# EAGLE board cfc-card (EAGLE 9.6.2), part 1 of 2
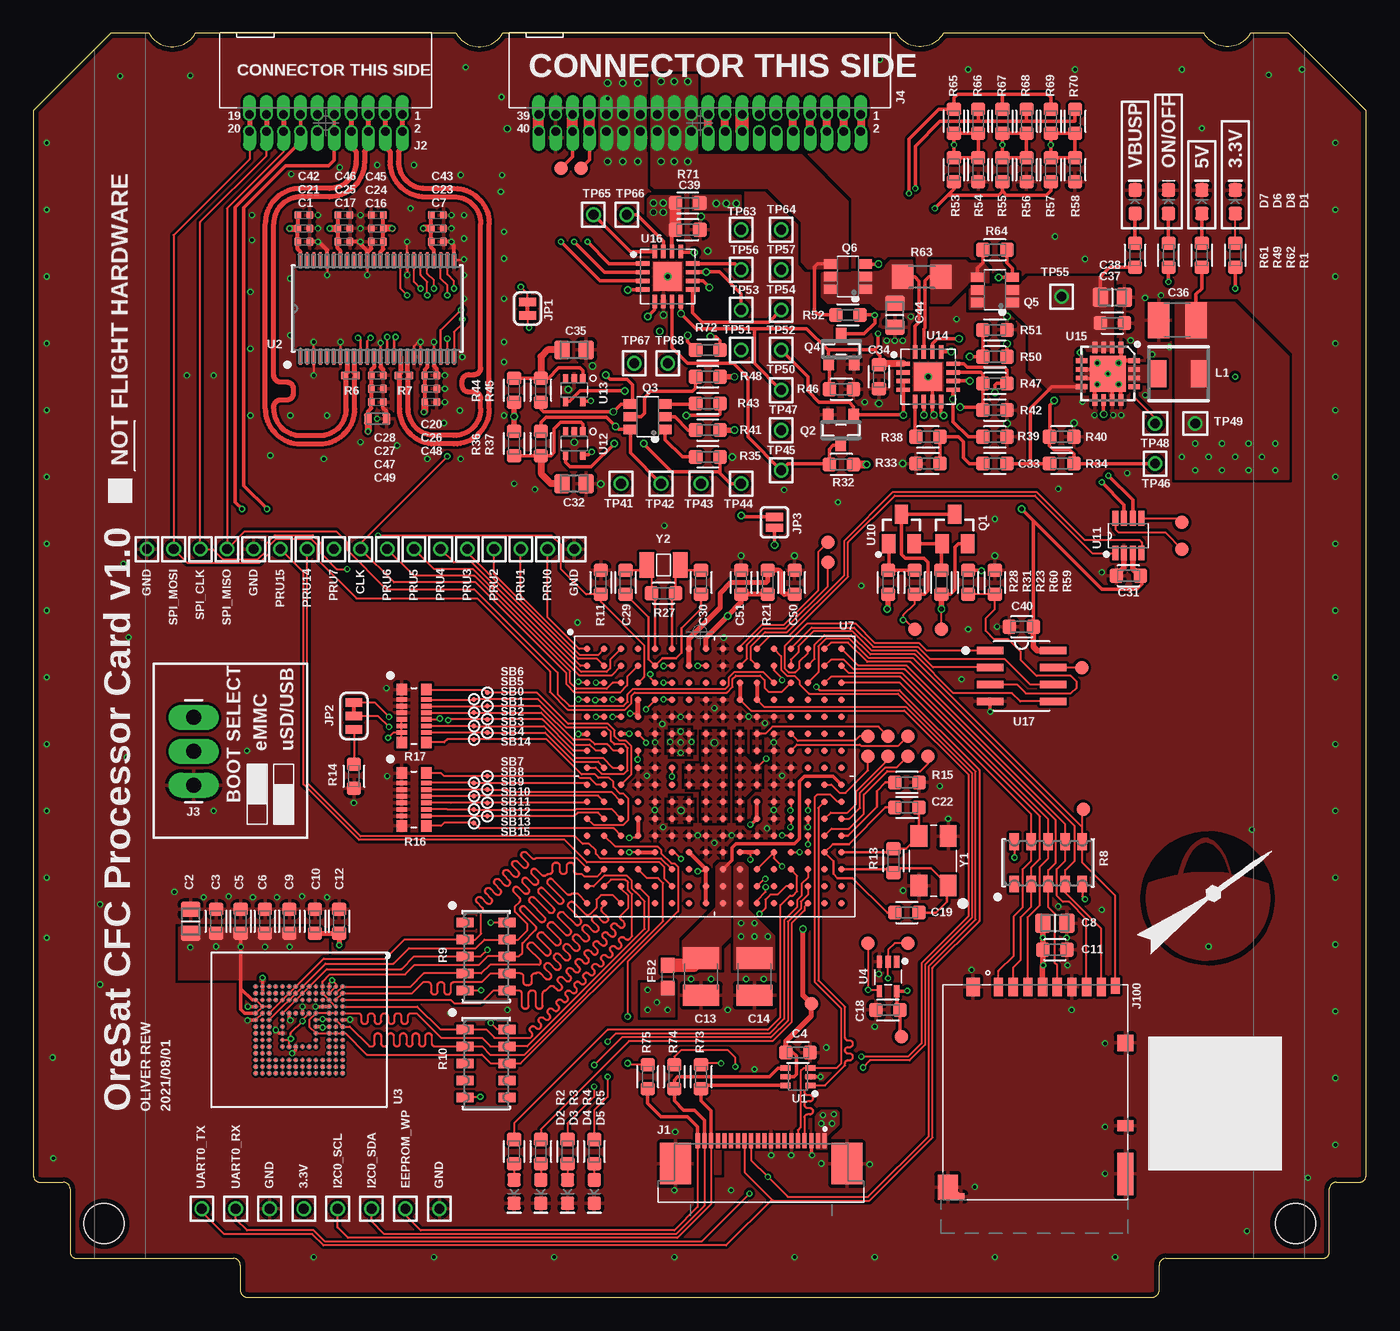
[diagram p0: board, top side]
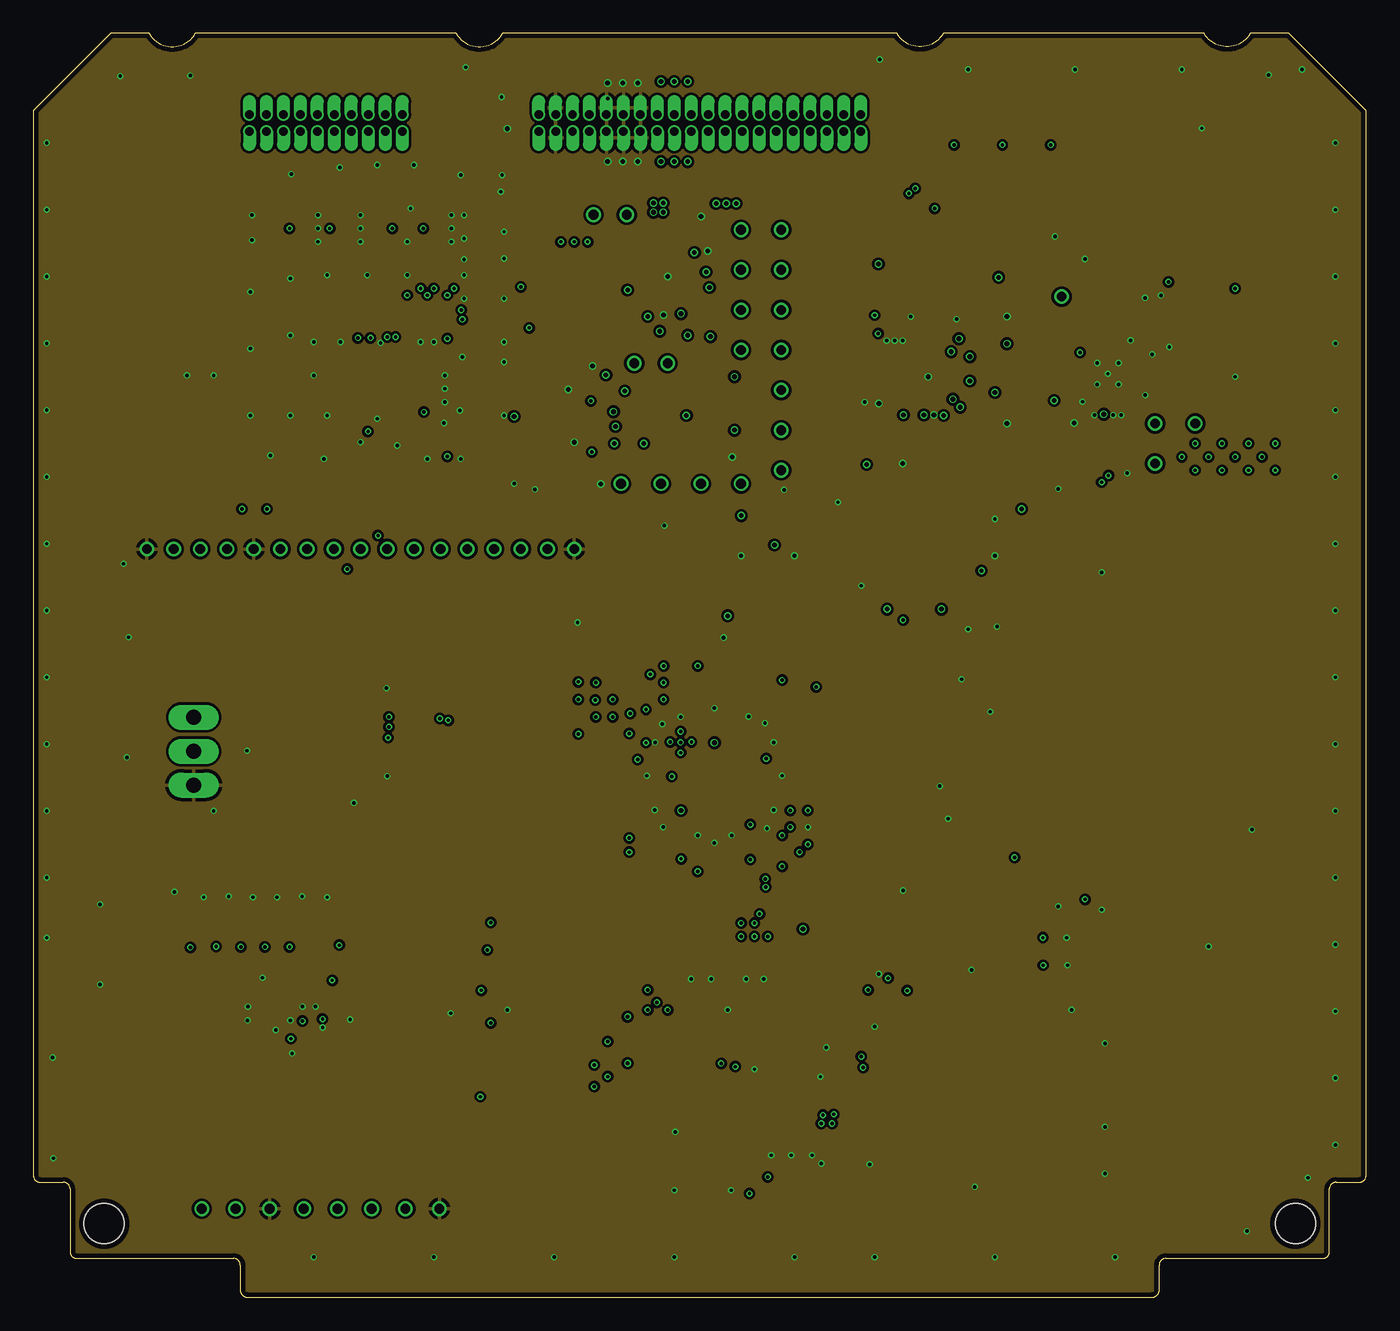
[diagram p1: board, inner layer Route2]
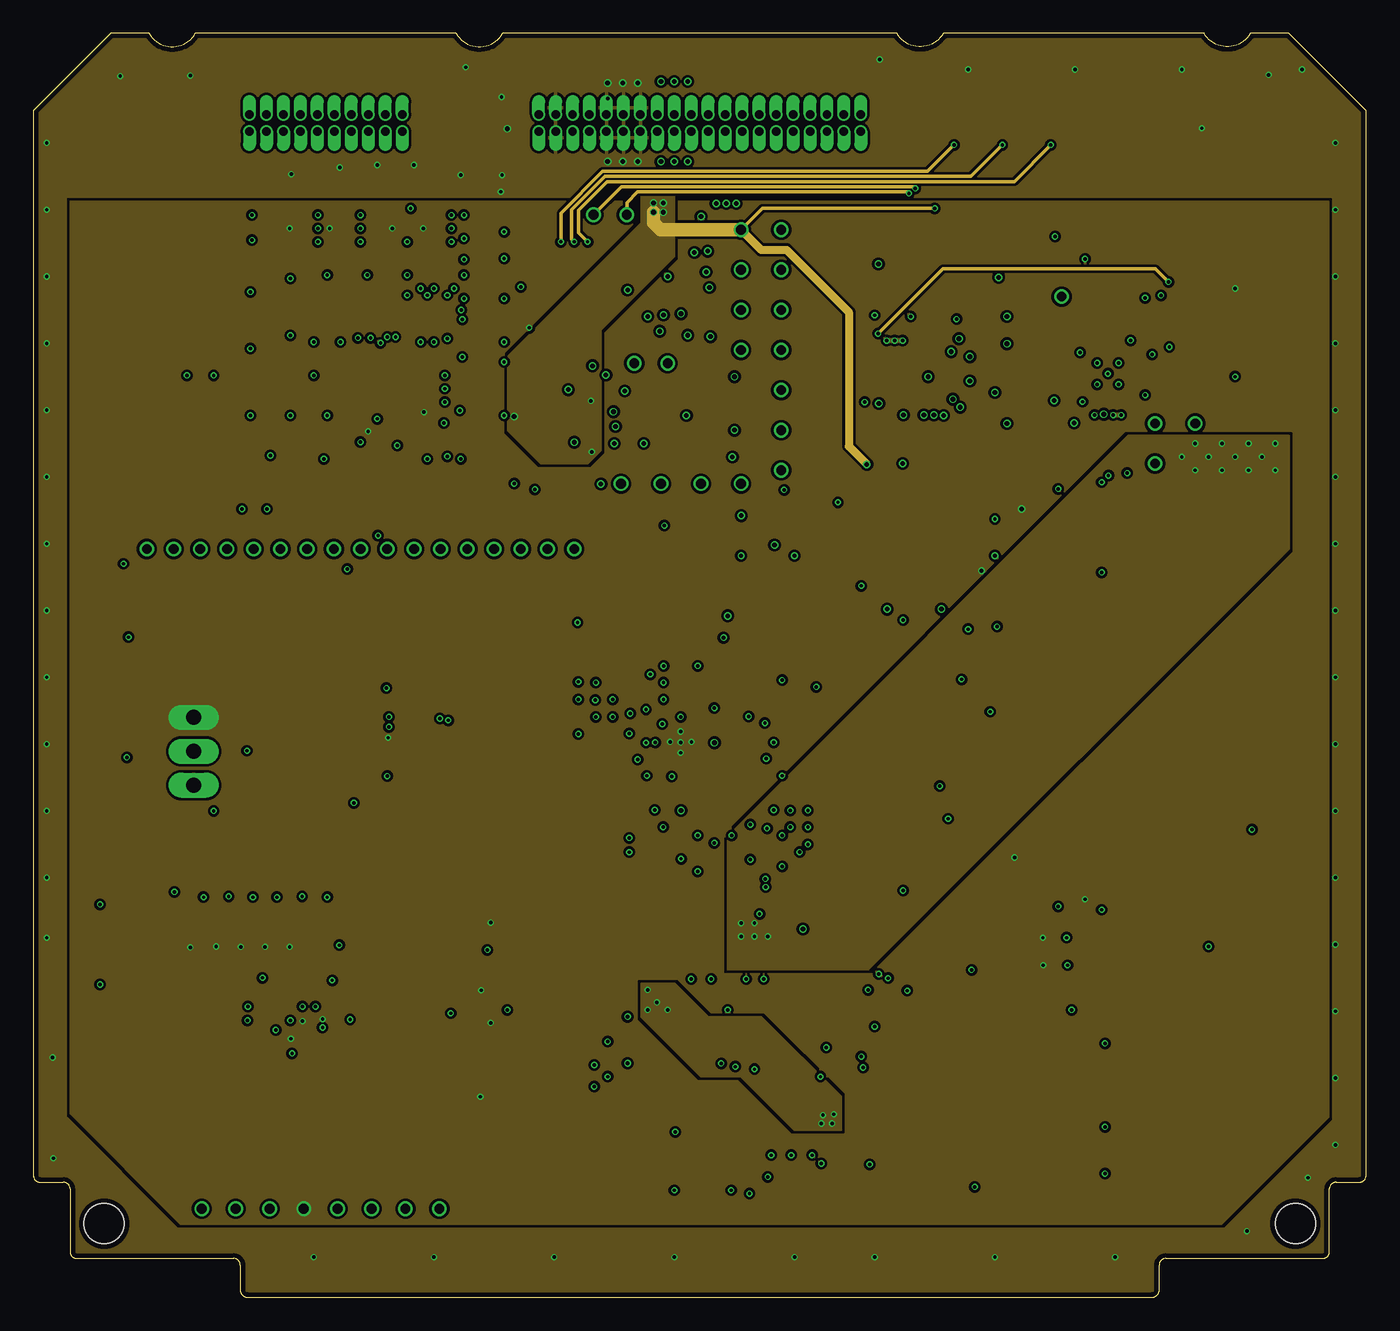
[diagram p2: board, inner layer Route15]
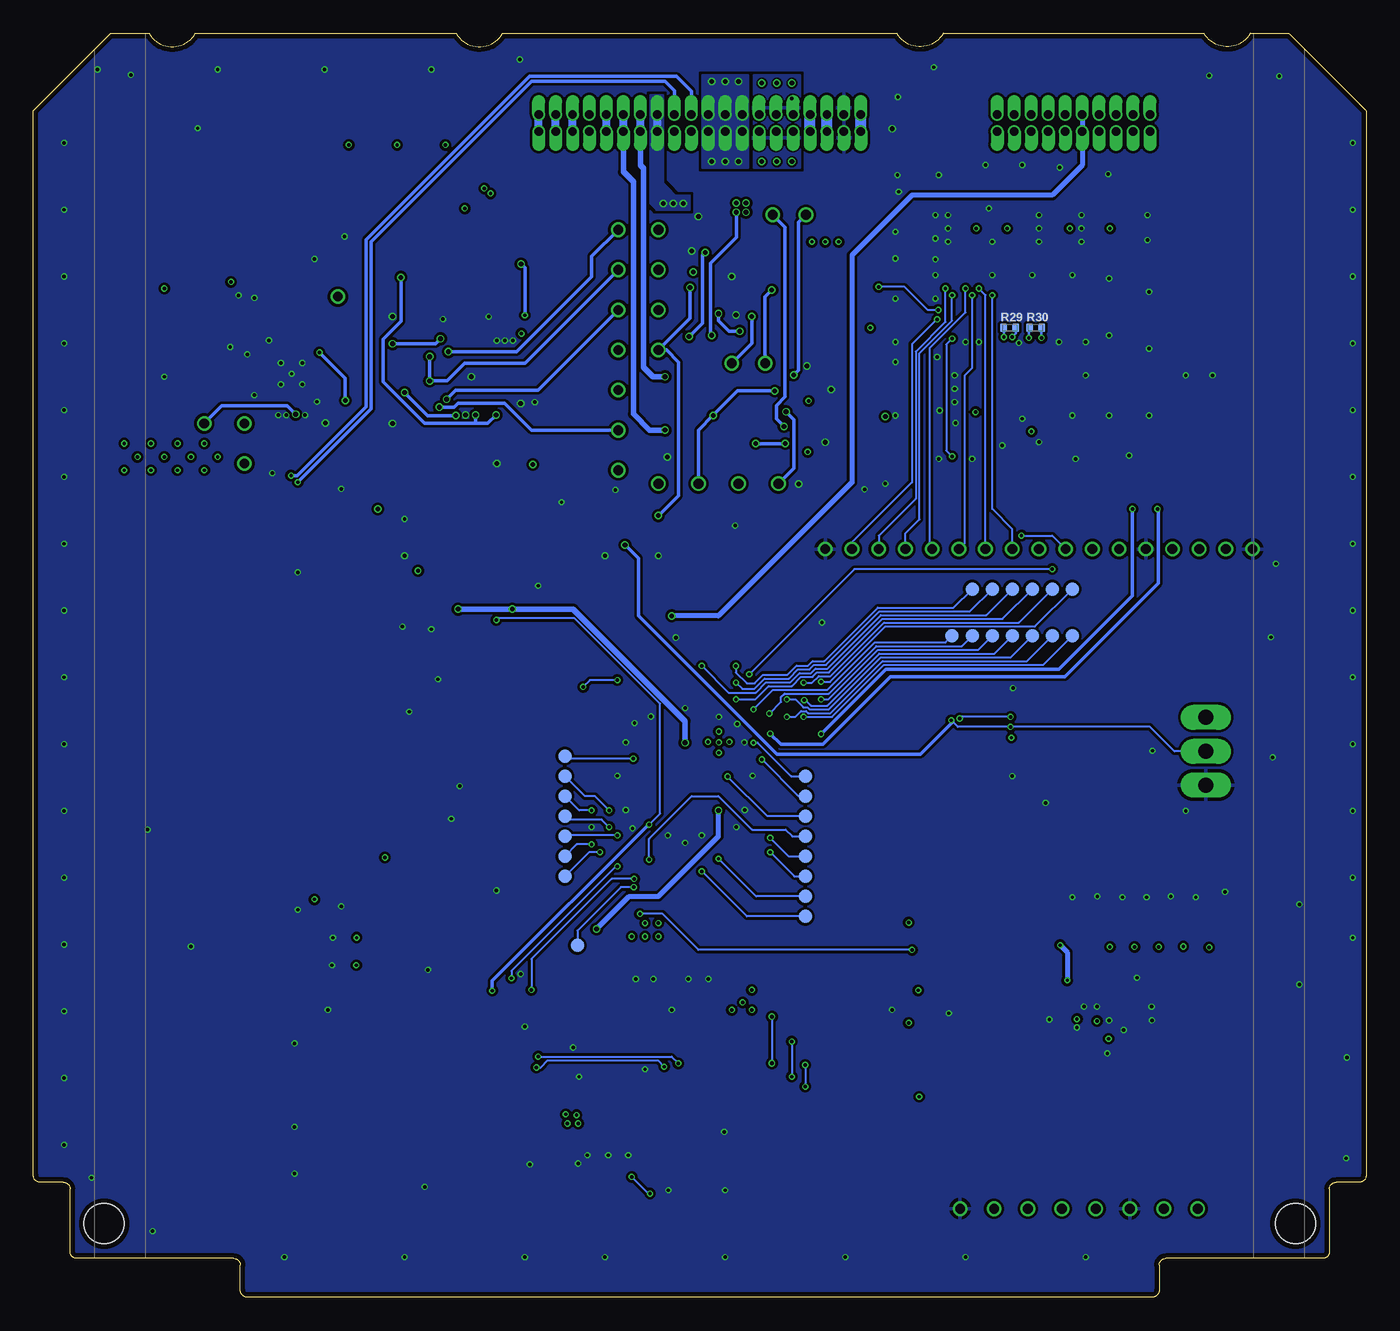
[diagram p3: board, bottom side, seen from below]

Size 99.8 x 94.6 mm. Coordinates in mm from the lower left corner, seen from the top.
Copper layers (1*2*15*16): Top 0.035559375mm / dielectric 0.17018125mm / Route2 0.01778125mm / dielectric 47mil / Route15 0.01778125mm / dielectric 0.17018125mm / Bottom 0.035559375mm
Design rules "4-layer_tented *": minimum track width 5mil, minimum drill 10mil, track to track 5mil, track to pad 5mil, pad to pad 5mil, via to via 5mil, smd to smd 5mil, copper to edge 15mil, drill to drill 6mil, minimum pad ring 4mil, minimum via ring 4mil, stop-mask expansion 2.5mil, vias tented up to drill 20mil, thermal gap 10mil
Net classes: 1 diff pair: width 0.381 mm, clearance 0.508 mm to class 0, clearance 0.254 mm

## Footprints (pad centres in the part's own frame; a part is rotated, then mirrored left to right if it is on the bottom)
.0402-C-NOSILK = smd 0.5 x 0.6: 1 -0.45,0; 2 0.45,0
.0805-B = smd 1.15 x 1.45: 1 -0.9,0; 2 0.9,0
.0603-A = smd 1 x 1.05: 1 -0.9,0; 2 0.9,0
C1210 = smd 1.6 x 2.7: 1 -1.4,0; 2 1.4,0
.0805-B-NOSILK = smd 1.15 x 1.45: 1 -0.9,0; 2 0.9,0
.0603-C-NOSILK = smd 0.6 x 0.9: 1 -0.7,0; 2 0.7,0
LED-0603 = smd 1 x 1: A -0.877,0; C 0.877,0
0603 = smd 1.1 x 1: 1 -0.85,0; 2 0.85,0
TE_2-1734592-0 = smd 0.3 x 1.1: 1 -4.75,-1.7; 2 -4.25,-1.7; 3 -3.75,-1.7; 4 -3.25,-1.7; 5 -2.75,-1.7; 6 -2.25,-1.7; 7 -1.75,-1.7; 8 -1.25,-1.7; 9 -0.75,-1.7; 10 -0.25,-1.7; 11 0.25,-1.7; 12 0.75,-1.7; 13 1.25,-1.7; 14 1.75,-1.7; 15 2.25,-1.7; 16 2.75,-1.7; 17 3.25,-1.7; 18 3.75,-1.7; 19 4.25,-1.7; 20 4.75,-1.7 | smd 2.3 x 3.1: PAD1 6.42,0; PAD2 -6.42,0
J-SAMTEC-TFM-110-X1-XXX-D-RA = drill 0.635 pad 0.965 offset: 1 5.715,0.635; 2 5.715,-0.635; 3 4.445,0.635; 4 4.445,-0.635; 5 3.175,0.635; 6 3.175,-0.635; 7 1.905,0.635; 8 1.905,-0.635; 9 0.635,0.635; 10 0.635,-0.635; 11 -0.635,0.635; 12 -0.635,-0.635; 13 -1.905,0.635; 14 -1.905,-0.635; 15 -3.175,0.635; 16 -3.175,-0.635; 17 -4.445,0.635; 18 -4.445,-0.635; 19 -5.715,0.635; 20 -5.715,-0.635
1X03_LONGPADS = drill 1.118 pad 1.88 long: 1 0,0; 2 2.54,0; 3 5.08,0
J-SAMTEC-TFM-120-X1-XXX-D-RA = drill 0.635 pad 0.965 offset: 1 12.065,0.635; 2 12.065,-0.635; 3 10.795,0.635; 4 10.795,-0.635; 5 9.525,0.635; 6 9.525,-0.635; 7 8.255,0.635; 8 8.255,-0.635; 9 6.985,0.635; 10 6.985,-0.635; 11 5.715,0.635; 12 5.715,-0.635; 13 4.445,0.635; 14 4.445,-0.635; 15 3.175,0.635; 16 3.175,-0.635; 17 1.905,0.635; 18 1.905,-0.635; 19 0.635,0.635; 20 0.635,-0.635; 21 -0.635,0.635; 22 -0.635,-0.635; 23 -1.905,0.635; 24 -1.905,-0.635; 25 -3.175,0.635; 26 -3.175,-0.635; 27 -4.445,0.635; 28 -4.445,-0.635; 29 -5.715,0.635; 30 -5.715,-0.635; 31 -6.985,0.635; 32 -6.985,-0.635; 33 -8.255,0.635; 34 -8.255,-0.635; 35 -9.525,0.635; 36 -9.525,-0.635; 37 -10.795,0.635; 38 -10.795,-0.635; 39 -12.065,0.635; 40 -12.065,-0.635
DM3BT-DSF-PEJS = smd 0.7 x 1.4: 1 -3.2,15.95; 2 -2.1,15.95; 3 -1,15.95; 4 0.1,15.95; 5 1.2,15.95; 6 2.3,15.95; 7 3.4,15.95; 8 4.5,15.95 | smd 0.7 x 1.2: CD 5.55,16.05 | smd 0.5 x 0.5: CGND1 -6,0.25 | smd 1.5 x 1.9: CGND2 -7,0.95 | smd 0.21 x 0.21 rotated 45: CGND3 -6.25,0.5 | smd 1 x 1.4: CGND4 -5.1,15.95 | smd 1.2 x 1.2: CGND5 6.3,11.75 | smd 1.2 x 3.2: CGND6 6.3,1.95 | smd 1.2 x 0.8: GND 6.3,5.55
SMT-JUMPER_2_NC_TRACE_SILK = smd 0.635 x 1.27: 1 -0.508,0; 2 0.508,0
SMT-JUMPER_3_1-NC_TRACE_SILK = smd 0.635 x 1.27: 1 -1.016,0; 2 0,0; 3 1.016,0
SMT-JUMPER_2_NO_SILK = smd 0.635 x 1.27: 1 -0.406,0; 2 0.406,0
ECS-MPI4040 = smd 2 x 1.3: 1 0,1.575; 2 0,-1.575
ORESAT-CARD-V1.3-GENERIC-0RF = hole 3: 94.5,5.5; 5.3,5.5
SOT23-BEC = smd 1 x 1.4: B -0.95,-1.1; C 0,1.1; E 0.95,-1.1
SOT23 = smd 0.787 x 0.889: 1 -0.953,-1.143; 2 0.953,-1.143; 3 0,1.143
SOT23-6 = smd 0.7 x 1: 1 -0.95,-1.3; 2 0,-1.3; 3 0.95,-1.3; 4 0.95,1.3; 5 0,1.3; 6 -0.95,1.3
ARRAY_EXBA-M = smd 1.27 x 0.711: 1 -1.575,2.54; 2 -1.575,1.27; 3 -1.575,0; 4 -1.575,-1.27; 5 -1.575,-2.54; 6 1.575,-2.54; 7 1.575,-1.27; 8 1.575,0; 9 1.575,1.27; 10 1.575,2.54
RES_EXB2HV = smd 0.787 x 0.864: 1 -0.914,1.981; 8 -0.914,-1.981; 9 0.914,-1.981; 16 0.914,1.981 | smd 0.787 x 0.356: 2 -0.914,1.234; 3 -0.914,0.74; 4 -0.914,0.247; 5 -0.914,-0.247; 6 -0.914,-0.74; 7 -0.914,-1.234; 10 0.914,-1.234; 11 0.914,-0.74; 12 0.914,-0.247; 13 0.914,0.247; 14 0.914,0.74; 15 0.914,1.234
R1206 = smd 1.6 x 1.803: 1 -1.422,0; 2 1.422,0
TEST-POINT-SMALL = smd 0.381 x 0.381: TP 0,0
2MM-TEST-POINT = drill 0.737: 1 0,0
PAD.03X.04 = smd 1.016 x 1.016: P$1 0,0
SC70-6 = smd 0.4 x 0.75: 1 -0.65,-0.925; 2 0,-0.925; 3 0.65,-0.925; 4 0.65,0.925; 5 0,0.925; 6 -0.65,0.925
MTD48_TEX-L = smd 1.168 x 0.178: 1 -3.619,5.75; 2 -3.619,5.25; 3 -3.619,4.75; 4 -3.619,4.25; 5 -3.619,3.75; 6 -3.619,3.25; 7 -3.619,2.75; 8 -3.619,2.25; 9 -3.619,1.75; 10 -3.619,1.25; 11 -3.619,0.75; 12 -3.619,0.25; 13 -3.619,-0.25; 14 -3.619,-0.75; 15 -3.619,-1.25; 16 -3.619,-1.75; 17 -3.619,-2.25; 18 -3.619,-2.75; 19 -3.619,-3.25; 20 -3.619,-3.75; 21 -3.619,-4.25; 22 -3.619,-4.75; 23 -3.619,-5.25; 24 -3.619,-5.75; 25 3.619,-5.75; 26 3.619,-5.25; 27 3.619,-4.75; 28 3.619,-4.25; 29 3.619,-3.75; 30 3.619,-3.25; 31 3.619,-2.75; 32 3.619,-2.25; 33 3.619,-1.75; 34 3.619,-1.25; 35 3.619,-0.75; 36 3.619,-0.25; 37 3.619,0.25; 38 3.619,0.75; 39 3.619,1.25; 40 3.619,1.75; 41 3.619,2.25; 42 3.619,2.75; 43 3.619,3.25; 44 3.619,3.75; 45 3.619,4.25; 46 3.619,4.75; 47 3.619,5.25; 48 3.619,5.75
BGA-153(11.5X13)(EMMC-BA) = smd 0.28 x 0.28: A1 -3.25,3.25; A2 -2.75,3.25; A3 -2.25,3.25; A4 -1.75,3.25; A5 -1.25,3.25; A6 -0.75,3.25; A7 -0.25,3.25; A8 0.25,3.25; A9 0.75,3.25; A10 1.25,3.25; A11 1.75,3.25; A12 2.25,3.25; A13 2.75,3.25; A14 3.25,3.25; B1 -3.25,2.75; B2 -2.75,2.75; B3 -2.25,2.75; B4 -1.75,2.75; B5 -1.25,2.75; B6 -0.75,2.75; B7 -0.25,2.75; B8 0.25,2.75; B9 0.75,2.75; B10 1.25,2.75; B11 1.75,2.75; B12 2.25,2.75; B13 2.75,2.75; B14 3.25,2.75; C1 -3.25,2.25; C2 -2.75,2.25; C3 -2.25,2.25; C4 -1.75,2.25; C5 -1.25,2.25; C6 -0.75,2.25; C7 -0.25,2.25; C8 0.25,2.25; C9 0.75,2.25; C10 1.25,2.25; C11 1.75,2.25; C12 2.25,2.25; C13 2.75,2.25; C14 3.25,2.25; D1 -3.25,1.75; D2 -2.75,1.75; D3 -2.25,1.75; D4 -1.75,1.75; D12 2.25,1.75; D13 2.75,1.75; D14 3.25,1.75; E1 -3.25,1.25; E2 -2.75,1.25; E3 -2.25,1.25; E5 -1.25,1.25; E6 -0.75,1.25; E7 -0.25,1.25; E8 0.25,1.25; E9 0.75,1.25; E10 1.25,1.25; E12 2.25,1.25; E13 2.75,1.25; E14 3.25,1.25; F1 -3.25,0.75; F2 -2.75,0.75; F3 -2.25,0.75; F5 -1.25,0.75; F10 1.25,0.75; F12 2.25,0.75; F13 2.75,0.75; F14 3.25,0.75; G1 -3.25,0.25; G2 -2.75,0.25; G3 -2.25,0.25; G5 -1.25,0.25; G10 1.25,0.25; G12 2.25,0.25; G13 2.75,0.25; G14 3.25,0.25; H1 -3.25,-0.25; H2 -2.75,-0.25; H3 -2.25,-0.25; H5 -1.25,-0.25; H10 1.25,-0.25; H12 2.25,-0.25; H13 2.75,-0.25; H14 3.25,-0.25; J1 -3.25,-0.75; J2 -2.75,-0.75; J3 -2.25,-0.75; J5 -1.25,-0.75; J10 1.25,-0.75; J12 2.25,-0.75; J13 2.75,-0.75; J14 3.25,-0.75; K1 -3.25,-1.25; K2 -2.75,-1.25; K3 -2.25,-1.25; K5 -1.25,-1.25; K6 -0.75,-1.25; K7 -0.25,-1.25; K8 0.25,-1.25; K9 0.75,-1.25; K10 1.25,-1.25; K12 2.25,-1.25; K13 2.75,-1.25; K14 3.25,-1.25; L1 -3.25,-1.75; L2 -2.75,-1.75; L3 -2.25,-1.75; L12 2.25,-1.75; L13 2.75,-1.75; L14 3.25,-1.75; M1 -3.25,-2.25; M2 -2.75,-2.25; M3 -2.25,-2.25; M4 -1.75,-2.25; M5 -1.25,-2.25; M6 -0.75,-2.25; M7 -0.25,-2.25; M8 0.25,-2.25; M9 0.75,-2.25; M10 1.25,-2.25; M11 1.75,-2.25; M12 2.25,-2.25; M13 2.75,-2.25; M14 3.25,-2.25; N1 -3.25,-2.75; N2 -2.75,-2.75; N3 -2.25,-2.75; N4 -1.75,-2.75; N5 -1.25,-2.75; N6 -0.75,-2.75; N7 -0.25,-2.75; N8 0.25,-2.75; N9 0.75,-2.75; N10 1.25,-2.75; N11 1.75,-2.75; N12 2.25,-2.75; N13 2.75,-2.75; N14 3.25,-2.75; P1 -3.25,-3.25; P2 -2.75,-3.25; P3 -2.25,-3.25; P4 -1.75,-3.25; P5 -1.25,-3.25; P6 -0.75,-3.25; P7 -0.25,-3.25; P8 0.25,-3.25; P9 0.75,-3.25; P10 1.25,-3.25; P11 1.75,-3.25; P12 2.25,-3.25; P13 2.75,-3.25; P14 3.25,-3.25
C70(TI-DCK) = smd 0.4 x 0.9: 1 0.65,1.1; 2 0,1.1; 3 -0.65,1.1; 4 -0.65,-1.1; 5 0.65,-1.1
OSD335X-BGA-256 = smd 0.5 x 0.5: A1 -9.525,-9.525; A2 -9.525,-8.255; A3 -9.525,-6.985; A4 -9.525,-5.715; A5 -9.525,-4.445; A6 -9.525,-3.175; A7 -9.525,-1.905; A8 -9.525,-0.635; A9 -9.525,0.635; A10 -9.525,1.905; A11 -9.525,3.175; A12 -9.525,4.445; A13 -9.525,5.715; A14 -9.525,6.985; A15 -9.525,8.255; A16 -9.525,9.525; B1 -8.255,-9.525; B2 -8.255,-8.255; B3 -8.255,-6.985; B4 -8.255,-5.715; B5 -8.255,-4.445; B6 -8.255,-3.175; B7 -8.255,-1.905; B8 -8.255,-0.635; B9 -8.255,0.635; B10 -8.255,1.905; B11 -8.255,3.175; B12 -8.255,4.445; B13 -8.255,5.715; B14 -8.255,6.985; B15 -8.255,8.255; B16 -8.255,9.525; C1 -6.985,-9.525; C2 -6.985,-8.255; C3 -6.985,-6.985; C4 -6.985,-5.715; C5 -6.985,-4.445; C6 -6.985,-3.175; C7 -6.985,-1.905; C8 -6.985,-0.635; C9 -6.985,0.635; C10 -6.985,1.905; C11 -6.985,3.175; C12 -6.985,4.445; C13 -6.985,5.715; C14 -6.985,6.985; C15 -6.985,8.255; C16 -6.985,9.525; D1 -5.715,-9.525; D2 -5.715,-8.255; D3 -5.715,-6.985; D4 -5.715,-5.715; D5 -5.715,-4.445; D6 -5.715,-3.175; D7 -5.715,-1.905; D8 -5.715,-0.635; D9 -5.715,0.635; D10 -5.715,1.905; D11 -5.715,3.175; D12 -5.715,4.445; D13 -5.715,5.715; D14 -5.715,6.985; D15 -5.715,8.255; D16 -5.715,9.525; E1 -4.445,-9.525; E2 -4.445,-8.255; E3 -4.445,-6.985; E4 -4.445,-5.715; E5 -4.445,-4.445; E6 -4.445,-3.175; E7 -4.445,-1.905; E8 -4.445,-0.635; E9 -4.445,0.635; E10 -4.445,1.905; E11 -4.445,3.175; E12 -4.445,4.445; E13 -4.445,5.715; E14 -4.445,6.985; E15 -4.445,8.255; E16 -4.445,9.525; F1 -3.175,-9.525; F2 -3.175,-8.255; F3 -3.175,-6.985; F4 -3.175,-5.715; F5 -3.175,-4.445; F6 -3.175,-3.175; F7 -3.175,-1.905; F8 -3.175,-0.635; F9 -3.175,0.635; F10 -3.175,1.905; F11 -3.175,3.175; F12 -3.175,4.445; F13 -3.175,5.715; F14 -3.175,6.985; F15 -3.175,8.255; F16 -3.175,9.525; G1 -1.905,-9.525; G2 -1.905,-8.255; G3 -1.905,-6.985; G4 -1.905,-5.715; G5 -1.905,-4.445; G6 -1.905,-3.175; G7 -1.905,-1.905; G8 -1.905,-0.635; G9 -1.905,0.635; G10 -1.905,1.905; G11 -1.905,3.175; G12 -1.905,4.445; G13 -1.905,5.715; G14 -1.905,6.985; G15 -1.905,8.255; G16 -1.905,9.525; H1 -0.635,-9.525; H2 -0.635,-8.255; H3 -0.635,-6.985; H4 -0.635,-5.715; H5 -0.635,-4.445; H6 -0.635,-3.175; H7 -0.635,-1.905; H8 -0.635,-0.635; H9 -0.635,0.635; H10 -0.635,1.905; H11 -0.635,3.175; H12 -0.635,4.445; H13 -0.635,5.715; H14 -0.635,6.985; H15 -0.635,8.255; H16 -0.635,9.525; J1 0.635,-9.525; J2 0.635,-8.255; J3 0.635,-6.985; J4 0.635,-5.715; J5 0.635,-4.445; J6 0.635,-3.175; J7 0.635,-1.905; J8 0.635,-0.635; J9 0.635,0.635; J10 0.635,1.905; J11 0.635,3.175; J12 0.635,4.445; J13 0.635,5.715; J14 0.635,6.985; J15 0.635,8.255; J16 0.635,9.525; K1 1.905,-9.525; K2 1.905,-8.255; K3 1.905,-6.985; K4 1.905,-5.715; K5 1.905,-4.445; K6 1.905,-3.175; K7 1.905,-1.905; K8 1.905,-0.635; K9 1.905,0.635; K10 1.905,1.905; K11 1.905,3.175; K12 1.905,4.445; K13 1.905,5.715; K14 1.905,6.985; K15 1.905,8.255; K16 1.905,9.525; L1 3.175,-9.525; L2 3.175,-8.255; L3 3.175,-6.985; L4 3.175,-5.715; L5 3.175,-4.445; L6 3.175,-3.175; L7 3.175,-1.905; L8 3.175,-0.635; L9 3.175,0.635; L10 3.175,1.905; L11 3.175,3.175; L12 3.175,4.445; L13 3.175,5.715; L14 3.175,6.985; L15 3.175,8.255; L16 3.175,9.525; M1 4.445,-9.525; M2 4.445,-8.255; M3 4.445,-6.985; M4 4.445,-5.715; M5 4.445,-4.445; M6 4.445,-3.175; M7 4.445,-1.905; M8 4.445,-0.635; M9 4.445,0.635; M10 4.445,1.905; M11 4.445,3.175; M12 4.445,4.445; M13 4.445,5.715; M14 4.445,6.985; M15 4.445,8.255; M16 4.445,9.525; N1 5.715,-9.525; N2 5.715,-8.255; N3 5.715,-6.985; N4 5.715,-5.715; N5 5.715,-4.445; N6 5.715,-3.175; N7 5.715,-1.905; N8 5.715,-0.635; N9 5.715,0.635; N10 5.715,1.905; N11 5.715,3.175; N12 5.715,4.445; N13 5.715,5.715; N14 5.715,6.985; N15 5.715,8.255; N16 5.715,9.525; P1 6.985,-9.525; P2 6.985,-8.255; P3 6.985,-6.985; P4 6.985,-5.715; P5 6.985,-4.445; P6 6.985,-3.175; P7 6.985,-1.905; P8 6.985,-0.635; P9 6.985,0.635; P10 6.985,1.905; P11 6.985,3.175; P12 6.985,4.445; P13 6.985,5.715; P14 6.985,6.985; P15 6.985,8.255; P16 6.985,9.525; R1 8.255,-9.525; R2 8.255,-8.255; R3 8.255,-6.985; R4 8.255,-5.715; R5 8.255,-4.445; R6 8.255,-3.175; R7 8.255,-1.905; R8 8.255,-0.635; R9 8.255,0.635; R10 8.255,1.905; R11 8.255,3.175; R12 8.255,4.445; R13 8.255,5.715; R14 8.255,6.985; R15 8.255,8.255; R16 8.255,9.525; T1 9.525,-9.525; T2 9.525,-8.255; T3 9.525,-6.985; T4 9.525,-5.715; T5 9.525,-4.445; T6 9.525,-3.175; T7 9.525,-1.905; T8 9.525,-0.635; T9 9.525,0.635; T10 9.525,1.905; T11 9.525,3.175; T12 9.525,4.445; T13 9.525,5.715; T14 9.525,6.985; T15 9.525,8.255; T16 9.525,9.525
SOT23-3 = smd 1 x 1.4: 1 -0.95,-1.1; 2 0.95,-1.1; 3 0,1.1
SOT23-8_TI-DCN = smd 0.45 x 1.1: 1 -0.975,-1.3; 2 -0.325,-1.3; 3 0.325,-1.3; 4 0.975,-1.3; 5 0.975,1.3; 6 0.325,1.3; 7 -0.325,1.3; 8 -0.975,1.3
SC70-5 = smd 0.4 x 0.7: 1 -0.65,-0.85; 2 0,-0.85; 3 0.65,-0.85; 4 0.65,0.85; 5 -0.65,0.85
QFN65P400X400X80-17T210 = smd 1.01 x 0.32: 1 -1.86,0.975; 2 -1.86,0.325; 3 -1.86,-0.325; 4 -1.86,-0.975; 9 1.86,-0.975; 10 1.86,-0.325; 11 1.86,0.325; 12 1.86,0.975 | smd 0.32 x 1.01: 5 -0.975,-1.86; 6 -0.325,-1.86; 7 0.325,-1.86; 8 0.975,-1.86; 13 0.975,1.86; 14 0.325,1.86; 15 -0.325,1.86; 16 -0.975,1.86 | smd 2.1 x 2.1: EPAD 0,0
S-PVQFN-16 = smd 0.85 x 0.35: 1 -1.975,0.975; 2 -1.975,0.325; 3 -1.975,-0.325; 4 -1.975,-0.975; 9 1.975,-0.975; 10 1.975,-0.325; 11 1.975,0.325; 12 1.975,0.975 | smd 0.35 x 0.85: 5 -0.975,-1.975; 6 -0.325,-1.975; 7 0.325,-1.975; 8 0.975,-1.975; 13 0.975,1.975; 14 0.325,1.975; 15 -0.325,1.975; 16 -0.975,1.975 | smd 2.7 x 2.7: PAD 0,0
SOIC8 = smd 1.981 x 0.559: 1 -2.362,1.905; 2 -2.362,0.635; 3 -2.362,-0.635; 4 -2.362,-1.905; 5 2.362,-1.905; 6 2.362,-0.635; 7 2.362,0.635; 8 2.362,1.905
5X3.2-4SMD = smd 1.6 x 1.25: 1 -1.85,-1.1; 2 1.85,-1.1; 3 1.85,1.1; 4 -1.85,1.1
CRYSTAL_3.2X1.5 = smd 1.1 x 1.9: P$1 -1.25,0; P$2 1.25,0

## Placement (x,y rotation side)
C1  1n  [.0402-C-NOSILK]  20.25,79 0 top
C2  10uF  [.0805-B]  11.78,28.12 90 top
C3  1uF  [.0603-A]  13.68,28.12 90 top
C4  0.1uF  [.0603-A]  57.25,18.31 0 top
C5  1uF  [.0603-A]  15.53,28.12 90 top
C6  1uF  [.0603-A]  17.34,28.12 90 top
C7  1n  [.0402-C-NOSILK]  30.25,79 0 top
C8  10uF  [.0805-B]  76.5,28 0 top
C9  1uF  [.0603-A]  19.18,28.12 90 top
C10  1uF  [.0603-A]  21.09,28.12 90 top
C11  0.1uF  [.0603-A]  76.5,26 0 top
C12  1uF  [.0603-A]  22.9,28.12 90 top
C13  22uF  [C1210]  50,24 270 top
C14  22uF  [C1210]  54,24 270 top
C16  1n  [.0402-C-NOSILK]  25.75,79 180 top
C17  1n  [.0402-C-NOSILK]  23.25,79 0 top
C18  0.1uF  [.0603-A]  64,21.5 180 top
C19  18pF, 50V  [.0603-A]  65.41,28.78 0 top
C20  1n  [.0402-C-NOSILK]  29.75,69 0 top
C21  10n  [.0402-C-NOSILK]  20.25,80 0 top
C22  18pF, 50V  [.0603-A]  65.41,36.66 0 top
C23  10n  [.0402-C-NOSILK]  30.25,80 0 top
C24  10n  [.0402-C-NOSILK]  25.75,80 180 top
C25  10n  [.0402-C-NOSILK]  23.25,80 0 top
C26  10n  [.0402-C-NOSILK]  29.75,68 0 top
C27  10n  [.0402-C-NOSILK]  25.75,68 0 top
C28  1n  [.0402-C-NOSILK]  25.75,69 0 top
C29  18pF, 50V  [.0603-A]  44.34,53.5 270 top
C30  18pF, 50V  [.0603-A]  50,53.5 270 top
C31  0.1uF  [.0603-A]  82,54 0 top
C32  1uF  [.0805-B-NOSILK]  40.5,60.9 0 top
C33  1uF  [.0603-A]  72,62.4 0 top
C34  1uF  [.0603-A]  63.31,68.9 270 top
C35  1uF  [.0805-B-NOSILK]  40.5,70.9 0 top
C36  22uF  [C1210]  85.66,73.14 180 top
C37  1uF  [.0603-A]  80.8,72.91 0 top
C38  10uF  [.0805-B]  80.79,74.84 0 top
C39  0.1uF  [.0603-A]  49,79.9 180 top
C40  DNP  [.0603-A]  74,50.19 0 top
C42  100n  [.0402-C-NOSILK]  20.25,81 0 top
C43  100n  [.0402-C-NOSILK]  30.25,81 0 top
C44  10uF  [.0805-B]  64.5,73.5 270 top
C45  100n  [.0402-C-NOSILK]  25.75,81 180 top
C46  100n  [.0402-C-NOSILK]  23.25,81 0 top
C47  100n  [.0402-C-NOSILK]  25.75,67 0 top
C48  100n  [.0402-C-NOSILK]  29.75,67 0 top
C49  10u  [.0603-C-NOSILK]  25.75,65.75 0 top
C50  0.1uF  [.0603-A]  57,53.5 90 top
C51  0.1u  [.0603-A]  53,53.5 90 top
D1  GREEN  [LED-0603]  90,82 90 top
D2  BLUE  [LED-0603]  36,7.9 270 top
D3  BLUE  [LED-0603]  38,7.9 270 top
D4  BLUE  [LED-0603]  40,7.9 270 top
D5  BLUE  [LED-0603]  42,7.9 270 top
D6  AMBER  [LED-0603]  85,82 90 top
D7  GREEN  [LED-0603]  82.5,82 90 top
D8  GREEN  [LED-0603]  87.5,82 90 top
FB2  30Ω/1.8A  [0603]  47.5,24 90 top
J1  ORESAT-DEBUG-CONNECTOR-ALL  [TE_2-1734592-0]  54.5,10 180 top
J2  J-SAMTEC-TFM-110-X1-XXX-D-RA  [J-SAMTEC-TFM-110-X1-XXX-D-RA]  21.9,87.9 0 top
J3  [1X03_LONGPADS]  12,43.4 270 top
J4  TFM-120-01-L-D-RA  [J-SAMTEC-TFM-120-X1-XXX-D-RA]  49.9,87.9 0 top
J100  DM3BT-DSF-PEJS  [DM3BT-DSF-PEJS]  75.47,7.28 0 top
JP1  JUMPER-SMT_2_NC_TRACE_SILK  [SMT-JUMPER_2_NC_TRACE_SILK]  37,74 90 top
JP2  JUMPER-SMT_3_1-NC_TRACE_SILK  [SMT-JUMPER_3_1-NC_TRACE_SILK]  24,43.5 90 top
JP3  JUMPER-SMT_2_NO_SILK  [SMT-JUMPER_2_NO_SILK]  55.5,58 270 top
L1  6.8u  [ECS-MPI4040]  85.76,69.12 90 top
PCB1  ORESAT-CARD-V1.3-GENERIC-0RF  [ORESAT-CARD-V1.3-GENERIC-0RF]  0,0 0 top
Q1  MMBT2907  [SOT23-BEC]  69,57.5 0 top
Q2  PMV45EN  [SOT23]  60.47,64.9 180 top
Q3  DMP2240UDM  [SOT23-6]  46,65.9 90 top
Q4  PMV45EN  [SOT23]  60.5,70.96 0 top
Q5  MOSFET-PCH-SOT23-6  [SOT23-6]  72,75.4 90 top
Q6  MOSFET-PCH-SOT23-6  [SOT23-6]  61,76.4 90 top
R1  1k  [.0603-A]  90,78 90 top
R2  1k  [.0603-A]  36,10.9 270 top
R3  1k  [.0603-A]  38,10.9 270 top
R4  1k  [.0603-A]  40,10.9 270 top
R5  1k  [.0603-A]  42,10.9 270 top
R6  100  [.0402-C-NOSILK]  23.75,69 180 top
R7  100  [.0402-C-NOSILK]  27.75,69 0 top
R8  10K  [ARRAY_EXBA-M]  76,32.5 90 top
R9  10K  [ARRAY_EXBA-M]  33.9,25.5 0 top
R10  10K  [ARRAY_EXBA-M]  33.9,17.5 0 top
R11  DNP  [.0603-A]  42.5,53.5 270 top
R13  1M  [.0603-A]  64.41,32.66 270 top
R14  DNP  [.0603-A]  24,39 90 top
R15  10k  [.0603-A]  65.41,38.53 180 top
R16  100k  [RES_EXB2HV]  28.5,37.25 0 top
R17  100k  [RES_EXB2HV]  28.5,43.5 0 top
R21  10k  [.0603-A]  55,53.5 90 top
R23  499  [.0603-A]  68,53.5 270 top
R27  DNP  [.0603-A]  47.19,52.69 0 top
R28  10k  [.0603-A]  64,53.5 270 top
R29  NP  [.0402-C-NOSILK]  26.69,72.56 0 bottom
R30  NP  [.0402-C-NOSILK]  24.75,72.56 0 bottom
R31  40.2K  [.0603-A]  66,53.5 90 top
R32  10k  [.0603-A]  60.5,62.34 0 top
R33  100k  [.0603-A]  67,62.4 0 top
R34  10k  [.0603-A]  77,62.4 180 top
R35  665k  [.0603-A]  50.5,62.9 180 top
R36  1M  [.0603-A]  36,63.9 90 top
R37  330k  [.0603-A]  38,63.9 90 top
R38  10k  [.0603-A]  67,64.4 0 top
R39  10k  [.0603-A]  72,64.4 180 top
R40  NP  [.0603-A]  77,64.4 180 top
R41  100  [.0603-A]  50.5,64.9 180 top
R42  NP  [.0603-A]  72,66.4 180 top
R43  665k  [.0603-A]  50.5,66.9 180 top
R44  1M  [.0603-A]  36,67.9 270 top
R45  330k  [.0603-A]  38,67.9 270 top
R46  10k  [.0603-A]  60.5,67.96 180 top
R47  0  [.0603-A]  72,68.4 0 top
R48  100  [.0603-A]  50.5,68.9 180 top
R49  2.7k  [.0603-A]  85,78 270 top
R50  10k  [.0603-A]  72,70.4 0 top
R51  4.7k  [.0603-A]  72,72.4 180 top
R52  10k  [.0603-A]  61,73.53 180 top
R53  NP  [.0603-A]  68.94,84.4 270 top
R54  NP  [.0603-A]  70.75,84.4 90 top
R55  NP  [.0603-A]  72.56,84.4 270 top
R56  NP  [.0603-A]  74.38,84.4 90 top
R57  NP  [.0603-A]  76.19,84.4 270 top
R58  NP  [.0603-A]  78,84.4 90 top
R59  DNP  [.0603-A]  72,53.5 90 top
R60  DNP  [.0603-A]  70,53.5 270 top
R61  2.7k  [.0603-A]  82.5,78 270 top
R62  2.7k  [.0603-A]  87.5,78 270 top
R63  100m  [R1206]  66.53,76.37 0 top
R64  10k  [.0603-A]  72,78.4 180 top
R65  NP  [.0603-A]  68.94,88.03 270 top
R66  NP  [.0603-A]  70.75,88.03 90 top
R67  NP  [.0603-A]  72.56,88.03 270 top
R68  NP  [.0603-A]  74.38,88.03 90 top
R69  NP  [.0603-A]  76.19,88.03 270 top
R70  NP  [.0603-A]  78,88.03 90 top
R71  100  [.0603-A]  49,81.9 180 top
R72  10k  [.0603-A]  50.5,70.9 180 top
R73  100  [.0603-A]  50,16.5 90 top
R74  100  [.0603-A]  48,16.5 90 top
R75  100  [.0603-A]  46,16.5 90 top
SB0  TEST-POINT-SMALL  [TEST-POINT-SMALL]  34,44.25 0 top
SB1  TEST-POINT-SMALL  [TEST-POINT-SMALL]  33,43.75 0 top
SB2  TEST-POINT-SMALL  [TEST-POINT-SMALL]  34,43.25 0 top
SB3  TEST-POINT-SMALL  [TEST-POINT-SMALL]  33,42.75 0 top
SB4  TEST-POINT-SMALL  [TEST-POINT-SMALL]  34,42.25 0 top
SB5  TEST-POINT-SMALL  [TEST-POINT-SMALL]  33,44.75 0 top
SB6  TEST-POINT-SMALL  [TEST-POINT-SMALL]  34,45.25 0 top
SB7  TEST-POINT-SMALL  [TEST-POINT-SMALL]  34,39 0 top
SB8  TEST-POINT-SMALL  [TEST-POINT-SMALL]  33,38.5 0 top
SB9  TEST-POINT-SMALL  [TEST-POINT-SMALL]  34,38 0 top
SB10  TEST-POINT-SMALL  [TEST-POINT-SMALL]  33,37.5 0 top
SB11  TEST-POINT-SMALL  [TEST-POINT-SMALL]  34,37 0 top
SB12  TEST-POINT-SMALL  [TEST-POINT-SMALL]  33,36.5 0 top
SB13  TEST-POINT-SMALL  [TEST-POINT-SMALL]  34,36 0 top
SB14  TEST-POINT-SMALL  [TEST-POINT-SMALL]  33,41.75 0 top
SB15  TEST-POINT-SMALL  [TEST-POINT-SMALL]  33,35.5 0 top
TP1  TEST-POINT  [2MM-TEST-POINT]  14.5,56 0 top
TP2  TEST-POINT  [2MM-TEST-POINT]  20.25,6.62 0 top
TP3  TEST-POINT3X4  [PAD.03X.04]  58.25,21.96 90 top
TP4  TEST-POINT3X4  [PAD.03X.04]  59.5,55 180 top
TP5  TEST-POINT3X4  [PAD.03X.04]  22,53 0 bottom
TP6  TEST-POINT3X4  [PAD.03X.04]  23.5,53 0 bottom
TP7  TEST-POINT3X4  [PAD.03X.04]  28,49.5 0 bottom
TP8  TEST-POINT3X4  [PAD.03X.04]  26.5,49.5 0 bottom
TP9  TEST-POINT3X4  [PAD.03X.04]  25,49.5 0 bottom
TP10  TEST-POINT3X4  [PAD.03X.04]  22,49.5 0 bottom
TP11  TEST-POINT3X4  [PAD.03X.04]  23.5,49.5 0 bottom
TP12  TEST-POINT3X4  [PAD.03X.04]  60,33 0 bottom
TP13  TEST-POINT3X4  [PAD.03X.04]  59.5,56.5 180 top
TP14  TEST-POINT3X4  [PAD.03X.04]  65,19.5 180 top
TP15  TEST-POINT3X4  [PAD.03X.04]  64,40.5 0 top
TP16  TEST-POINT3X4  [PAD.03X.04]  65.5,40.5 0 top
TP17  TEST-POINT3X4  [PAD.03X.04]  67,40.5 0 top
TP18  TEST-POINT  [2MM-TEST-POINT]  10.5,56 0 top
TP19  TEST-POINT  [2MM-TEST-POINT]  12.5,56 0 top
TP20  TEST-POINT  [2MM-TEST-POINT]  24.5,56 0 top
TP21  TEST-POINT  [2MM-TEST-POINT]  22.5,56 0 top
TP22  TEST-POINT3X4  [PAD.03X.04]  78.62,36.53 0 top
TP23  TEST-POINT  [2MM-TEST-POINT]  26.5,56 0 top
TP24  TEST-POINT  [2MM-TEST-POINT]  28.5,56 0 top
TP26  TEST-POINT  [2MM-TEST-POINT]  30.5,56 0 top
TP27  TEST-POINT  [2MM-TEST-POINT]  32.5,56 0 top
TP28  TEST-POINT  [2MM-TEST-POINT]  34.5,56 0 top
TP29  TEST-POINT  [2MM-TEST-POINT]  36.5,56 0 top
TP30  TEST-POINT  [2MM-TEST-POINT]  38.5,56 0 top
TP31  TEST-POINT  [2MM-TEST-POINT]  15.15,6.61 0 top
TP32  TEST-POINT  [2MM-TEST-POINT]  12.62,6.61 0 top
TP33  TEST-POINT  [2MM-TEST-POINT]  20.5,56 0 top
TP34  TEST-POINT  [2MM-TEST-POINT]  18.5,56 0 top
TP35  TEST-POINT3X4  [PAD.03X.04]  86,58 180 top
TP36  TEST-POINT3X4  [PAD.03X.04]  26.5,53 180 bottom
TP37  TEST-POINT3X4  [PAD.03X.04]  29.5,53 180 bottom
TP38  TEST-POINT3X4  [PAD.03X.04]  28,53 180 bottom
TP39  TEST-POINT  [2MM-TEST-POINT]  22.78,6.62 0 top
TP40  TEST-POINT3X4  [PAD.03X.04]  86,56 180 top
TP41  TEST-POINT  [2MM-TEST-POINT]  44,60.9 0 top
TP42  TEST-POINT  [2MM-TEST-POINT]  47,60.9 0 top
TP43  TEST-POINT  [2MM-TEST-POINT]  50,60.9 0 top
TP44  TEST-POINT  [2MM-TEST-POINT]  53,60.9 0 top
TP45  TEST-POINT  [2MM-TEST-POINT]  56,61.9 0 top
TP46  TEST-POINT  [2MM-TEST-POINT]  84,62.4 0 top
TP47  TEST-POINT  [2MM-TEST-POINT]  56,64.9 0 top
TP48  TEST-POINT  [2MM-TEST-POINT]  84,65.4 270 top
TP49  TEST-POINT  [2MM-TEST-POINT]  87,65.4 270 top
TP50  TEST-POINT  [2MM-TEST-POINT]  56,67.9 0 top
TP51  TEST-POINT  [2MM-TEST-POINT]  53,70.9 0 top
TP52  TEST-POINT  [2MM-TEST-POINT]  56,70.9 0 top
TP53  TEST-POINT  [2MM-TEST-POINT]  53,73.9 0 top
TP54  TEST-POINT  [2MM-TEST-POINT]  56,73.9 0 top
TP55  TEST-POINT  [2MM-TEST-POINT]  77,74.9 0 top
TP56  TEST-POINT  [2MM-TEST-POINT]  53,76.9 0 top
TP57  TEST-POINT  [2MM-TEST-POINT]  56,76.9 0 top
TP63  TEST-POINT  [2MM-TEST-POINT]  53,79.9 0 top
TP64  TEST-POINT  [2MM-TEST-POINT]  56,79.9 0 top
TP65  TEST-POINT  [2MM-TEST-POINT]  41.94,81.03 0 top
TP66  TEST-POINT  [2MM-TEST-POINT]  44.44,81.03 0 top
TP67  TEST-POINT  [2MM-TEST-POINT]  45,69.9 0 top
TP68  TEST-POINT  [2MM-TEST-POINT]  47.5,69.9 0 top
TP69  TEST-POINT3X4  [PAD.03X.04]  78.5,47.12 180 top
TP70  TEST-POINT  [2MM-TEST-POINT]  25.32,6.62 0 top
TP71  TEST-POINT  [2MM-TEST-POINT]  27.86,6.62 0 top
TP72  TEST-POINT  [2MM-TEST-POINT]  30.4,6.62 0 top
TP74  TEST-POINT  [2MM-TEST-POINT]  8.5,56 180 top
TP75  TEST-POINT  [2MM-TEST-POINT]  16.5,56 0 top
TP77  TEST-POINT  [2MM-TEST-POINT]  40.5,56 0 top
TP78  TEST-POINT  [2MM-TEST-POINT]  17.7,6.61 0 top
TP102  TEST-POINT3X4  [PAD.03X.04]  59.06,26.32 180 bottom
TP109  TEST-POINT3X4  [PAD.03X.04]  62.5,26.5 0 top
TP110  TEST-POINT3X4  [PAD.03X.04]  65.5,26.5 0 top
TP121  TEST-POINT3X4  [PAD.03X.04]  41.97,34.49 90 bottom
TP129  TEST-POINT3X4  [PAD.03X.04]  42,30 90 bottom
TP130  TEST-POINT3X4  [PAD.03X.04]  42,28.5 90 bottom
TP132  TEST-POINT3X4  [PAD.03X.04]  42,31.5 90 bottom
TP133  TEST-POINT3X4  [PAD.03X.04]  60,31.5 0 bottom
TP136  TEST-POINT3X4  [PAD.03X.04]  60,34.5 0 bottom
TP138  TEST-POINT3X4  [PAD.03X.04]  60,37.5 0 bottom
TP139  TEST-POINT3X4  [PAD.03X.04]  62.5,40.5 0 top
TP140  TEST-POINT3X4  [PAD.03X.04]  42,33 90 bottom
TP141  TEST-POINT3X4  [PAD.03X.04]  60,39 0 bottom
TP144  TEST-POINT3X4  [PAD.03X.04]  60,36 0 bottom
TP154  TEST-POINT3X4  [PAD.03X.04]  42,37.5 0 bottom
TP156  TEST-POINT3X4  [PAD.03X.04]  42,39 0 bottom
TP157  TEST-POINT3X4  [PAD.03X.04]  42,36 0 bottom
TP160  TEST-POINT3X4  [PAD.03X.04]  62.5,42 270 top
TP161  TEST-POINT3X4  [PAD.03X.04]  64,42 90 top
TP163  TEST-POINT3X4  [PAD.03X.04]  60,40.5 0 bottom
TP164  TEST-POINT3X4  [PAD.03X.04]  66,50 180 top
TP165  TEST-POINT3X4  [PAD.03X.04]  68,50 180 top
TP166  TEST-POINT3X4  [PAD.03X.04]  65.5,42 270 top
TP167  TEST-POINT3X4  [PAD.03X.04]  29.5,49.5 180 bottom
TP168  TEST-POINT3X4  [PAD.03X.04]  25,53 0 bottom
TP173  TEST-POINT3X4  [PAD.03X.04]  31,49.5 0 bottom
TP183  TEST-POINT3X4  [PAD.03X.04]  39.5,84.5 0 top
TP184  TEST-POINT3X4  [PAD.03X.04]  41,84.5 0 top
U1  RCLAMP0504FB  [SC70-6]  57.25,16.5 90 top
U2  DS90CR218AMTD/NOPBMTD48_TEX-L  [MTD48_TEX-L]  25.75,74 90 top
U3  THGBMJG7C2LBAU8  [BGA-153(11.5X13)(EMMC-BA)]  19.9,20 270 top
U4  SN74LVC1G07DCK  [C70(TI-DCK)]  64,24 0 top
U7  OSD3358-512M-BSM  [OSD335X-BGA-256]  51,39 270 top
U10  TLVH431  [SOT23-3]  65,57.5 0 top
U11  TCAN330  [SOT23-8_TI-DCN]  82,57 0 top
U12  MIC842LYC5  [SC70-5]  40.5,63.9 180 top
U13  MIC842LYC5  [SC70-5]  40.5,67.9 180 top
U14  MAX4211FETE  [QFN65P400X400X80-17T210]  67,68.9 0 top
U15  TPS62112  [S-PVQFN-16]  80.46,69.12 270 top
U16  MAX7310ATE  [QFN65P400X400X80-17T210]  47.5,76.4 0 top
U17  25AAXX  [SOIC8]  74,46.5 0 top
U$1  FLIGHMARKERNEW  [FLIGHTMARKER_NEW_BOARDS]  7.1,59.7 90 top
U$2  [CAMERA_BOARD_TOP_DIMS]  10.25,21.1 0 top
U$3  [PSAS_LOGO_10X10]  88,29.9 0 top
U$4  [ORESAT_ORIENTATION_COPPER]  88,43.5 0 top
Y1  24MHz  [5X3.2-4SMD]  67.41,32.66 90 top
Y2  ABS07-32.768KHZ-T  [CRYSTAL_3.2X1.5]  47.19,54.81 0 top

## Library data of the parts
C1 C7 C16 C17 C20 C28 = oresat-rcl; DIS: Digi-Key; DPN: 490-6350-1-ND; MFR: Murata; MPN: GRM155R71H102KA01J
C2-C6 C8-C14 C18 C19 C22 C29-C32 C34-C40 C44 C50 C51 R1-R5 R11 R13-R15 R21 R23 R27 R28 R31 R32 R34-R37 R39 R41 R43-R50 R52 R59-R62 R64 R71-R75 = oresat-rcl
C21 C23-C27 = oresat-rcl; DIS: Digi-Key; DPN: 399-7842-1-ND; MFR: Kemet; MPN: C0603C103M5RACTU
C33 = oresat-rcl; DIS: Digi-Key; DPN: 1276-1001-1-ND; MFR: Samsung
C42 C43 C45-C48 = oresat-rcl; DIS: Digi-Key; DPN: 399-1177-1-ND; MFR: Kemet; MPN: C0805C104Z5VACTU
C49 = oresat-rcl; DIS: Digi-Key; DPN: 490-14372-1-ND; MFR: Murata; MPN: GRM188R61A106KE69J
D1 D6-D8 = SparkFun-LED
D2-D5 = SparkFun-LED; PROD_ID: DIO-08575
FB2 = SparkFun-Coils; DPN: 490-14027-1-ND; MPN: BLM18KG300JH1D
J1 = oresat-debug-connector; DPN: A100287CT-ND; MPN: 2-1734592-0
J2 = J-Samtec-TFM-110-X1-XXX-D-RA; DIS: Digikey; DPN: SAM10113-ND; MFR: Samtec; MPN: TFM-110-01-L-D-RA
J3 TP3-TP17 TP22 TP35-TP38 TP40 TP69 TP102 TP109 TP110 TP121 TP129 TP130 TP132 TP133 TP136 TP138-TP141 TP144 TP154 TP156 TP157 TP160 TP161 TP163-TP168 TP173 TP183 TP184 = SparkFun-Connectors
J4 = J-Samtec-TFM-120-X1-XXX-D-RA; DPN: SAM10145-ND; MPN: TFM-120-01-L-D-RA
J100 = J-Hirose-DM3BT-DSF-PEJS; DPN: DM3BT-DSF-PEJS; MPN: DM3BT-DSF-PEJS
JP1-JP3 = SparkFun-Jumpers
L1 = L-ECS-MPI4040; DPN: XC2337CT-ND; MPN: ECS-MPI4040R4-6R8-R
PCB1 U$2 = oresat-cards
Q1 = Q-Diodesinc-MMBT2907-PNP; DPN: MMBT2907A-FDICT-ND; MPN: MMBT2907A-7-F
Q2 Q4 = Tova; DPN: 1727-2307-1-ND; MPN: PMV45EN2R
Q3 = Q-MOSFET-PCH-dual-SOT23-6; MFR: Diodes Inc; MPN: DMP2240UDM-7
Q5 Q6 = Q-MOSFET-PCH-SOT23-6; DPN: DMP3050LVT-7DICT-ND; MPN: DMP3050LVT-7
R6 R7 R29 R30 = oresat-rcl; DIS: Dgi-Key; DPN: 311-100MCT-ND; MFR: Yageo; MPN: RC0201FR-07100RL
R8-R10 = R-Panasonic-EXB_A10PXXXJ; DPN: U7103CT-ND; MFR: Panasonic Electronic Components; MPN_GENERIC: EXB-A10PXXXJ
R16 R17 = R-Panasonic-EXB-2HV103JV; BUILT_BY: EMA_UL_Team; DPN: Y1103CT-ND; MPN: EXB-2HV103JV; SOURCELIBRARY: Update_to_database_2020-12-03; VENDOR: Panasonic
R33 R38 R40 R42 R51 R53-R58 R65-R70 = oresat-rcl; DIS: Digi-Key; DPN: 1276-4275-1-ND; MFR: Samsung; MPN: RC1005F6653CS
R63 = rcl; SPICEPREFIX: R
SB0 SB1-SB15 = oresat-misc; BOM: EXCLUDE
TP1 TP2 TP18-TP21 TP23 TP24 TP26-TP34 TP39 TP41-TP57 TP63-TP68 TP70-TP72 TP74 TP75 TP77 TP78 = Tova
U1 = U-Semtec-RCLAMP0504FB; DPN: RCLAMP0504FBTCTCT-ND; MPN: RCLAMP0504FBTCT
U2 = U-TI-DS90CR218-LVDSReceiver; DIS: Digi-Key; DPN: DS90CR218AMTD/NOPB-ND; MFR: Texas Instruments; MPN: DS90CR218AMTD/NOPB
U3 = U-Generic-eMMC-153pin; DPN: THGBMJG7C2LBAU8-ND; MPN: THGBMJG7C2LBAU8
U4 = U-TI-SN74LVC1G07DCK-Buffer; DPN: 296-8486-1-ND; MPN: SN74LVC1G07DCKR
U7 = U-OSD3358-512M-BSM; DPN: 1676-1002-ND; MFR: Octavo Systems; MPN: OSD3358-512M-BSM; PACKAGE: BGA-400 Octavo Systems
U10 = U-TI-TLVH431-Shunt-Regulator; DPN: 296-36778-1-ND; MPN: TLVH431BQDBZRQ1
U11 = U-TI-TCAN330-CAN-transceiver; DPN: 296-44211-1-ND; MPN: TCAN330GDCNT
U12 U13 = U-Microchip-MIC842-Comparator; DPN: 576-2927-1-ND; MPN: MIC842LYC5
U14 = U-Maxim-MAX4211-power-monitor; DPN: MAX4211FETE+-ND; MPN: MAX4211FETE+
U15 = U-TI-TPS6211x-SPS-buck; DPN: 296-39444-1-ND; MPN: TPS62112RSAR
U16 = U-Maxim-MAX7310-I2C-GPIO-expander; DPN: MAX7310ATE+-ND; MFR: Maxim; MPN: MAX7310ATE
U17 = U-Generic-SPI-EEPROM; MPN: 25AA02E48T-I/SN
U$1 = oresat-flight-marker
U$3 = psas-logo
U$4 = oresat-misc
Y1 = X-ECS-240-12-30BQ-AEN-TR; DPN: XC2580CT-ND; MPN: ECS-240-12-30BQ-AEN-TR
Y2 = OSD3358-SM-RED Platform; DPN: 535-9542-1-ND; MPN: ABS07-32.768KHZ-T

## Nets
1.8V-A: C50.1 R21.2 U7.A7 U7.B7
3.3V: C1.1 C2.1 C3.1 C5.1 C6.1 C7.1 C8.1 C9.1 C11.1 C16.1 C17.1 C20.1 C21.1 C23.1 C24.1 C25.1 C26.1 C27.1 C28.1 C31.2 C40.2 C42.1 C43.1 C45.1 C46.1 C47.1 C48.1 C49.1 J3.1 J100.4 JP1.1 R1.1 R8.5 R8.10 R9.5 R9.10 R10.5 R10.10 R17.5 R17.6 R17.7 R17.8 R60.1 TP2.1 U2.12 U2.20 U2.28 U2.36 U2.42 U2.48 U3.C6 U3.E6 U3.F5 U3.J10 U3.K9 U3.M4 U3.N4 U3.P3 U3.P5 U7.F6 U7.F7 U7.G6 U7.G7 U11.3 U17.8
3.3VA: Q1.E R23.2 R28.2 TP165.P$1 U7.F8 U7.F9 U7.G8 U7.G9 U7.H7 U7.H8 U7.H9 U7.J7 U7.J8 U7.J9 U7.K8 U7.K9 U7.L8 U7.L9
5V: C14.1 C36.1 L1.2 R62.2 TP49.1 U7.P10 U7.R10 U7.T10 U15.10
!EMMC_RST: R9.3 U3.K5 U7.R13
!FAULT: Q2.3 R32.1 TP45.1 U16.7
!PWR_DWN: JP1.2 U2.22
!SD: J4.39 J4.40
AD0: R57.1 R58.2 R69.2 R70.1 U16.1
AD1: R55.1 R56.2 R67.2 R68.1 U16.2
AD2: R53.1 R54.2 R65.2 R66.1 U16.3
BOOT0: JP3.1 TP51.1 U16.10
CAN1_H: J4.33 J4.34 TP184.P$1
CAN1_L: J4.35 J4.36 TP183.P$1
CAN2_H: J4.17 J4.18 U11.7
CAN2_L: J4.19 J4.20 U11.6
CB-RESET: R39.2 TP54.1 U14.9 U16.9
CB_CTRL: Q2.1 Q5.3 R64.1 TP52.1 U14.3 U14.4 U14.6
EEPROM_WP: J1.20 R75.1 TP71.1
EMMC_CLK: R9.9 U3.M6 U7.P2
EMMC_CMD: R9.2 U3.M5 U7.P1
EMMC_DAT0: R9.6 U3.A3 U7.R3
EMMC_DAT1: R10.1 U3.A4 U7.R2
EMMC_DAT2: R10.9 U3.A5 U7.R1
EMMC_DAT3: R9.4 U3.B2 U7.T3
EMMC_DAT4: R9.7 U3.B3 U7.T2
EMMC_DAT5: R9.8 U3.B4 U7.T1
EMMC_DAT6: R10.8 U3.B5 U7.P4
EMMC_DAT7: R10.2 U3.B6 U7.R4
GND: C1.2 C2.2 C3.2 C4.2 C5.2 C6.2 C7.2 C8.2 C9.2 C10.2 C11.2 C12.2 C13.2 C14.2 C16.2 C17.2 C18.2 C20.2 C21.2 C23.2 C24.2 C25.2 C26.2 C27.2 C28.2 C31.1 C32.2 C34.2 C35.2 C36.2 C37.2 C38.2 C39.1 C40.1 C42.2 C43.2 C44.2 C45.2 C46.2 C47.2 C48.2 C49.2 C50.2 C51.2 D1.C D2.C D3.C D4.C D5.C D6.C D7.C D8.C J1.3 J1.6 J1.9 J1.PAD1 J1.PAD2 J3.3 J4.27 J4.28 J4.29 J4.30 J4.31 J4.32 J4.37 J4.38 J100.6 J100.CGND1 J100.CGND2 J100.CGND3 J100.CGND4 J100.CGND5 J100.CGND6 J100.GND Q2.2 Q4.2 R11.1 R14.1 R15.1 R16.1 R16.2 R16.3 R16.4 R16.5 R16.6 R16.7 R16.8 R17.1 R17.2 R17.3 R17.4 R33.1 R39.1 R40.1 R42.1 R46.1 R51.1 R54.1 R56.1 R58.1 R59.2 TP72.1 TP74.1 TP75.1 TP77.1 TP78.1 U1.2 U2.3 U2.7 U2.13 U2.18 U2.19 U2.21 U2.25 U2.32 U2.38 U2.44 U3.A6 U3.C4 U3.E7 U3.G5 U3.H10 U3.J5 U3.K8 U3.N2 U3.N5 U3.P4 U3.P6 U4.3 U7.A9 U7.B9 U7.D8 U7.D9 U7.E5 U7.E6 U7.E7 U7.E8 U7.E9 U7.E10 U7.E11 U7.E12 U7.F5 U7.F12 U7.G5 U7.G12 U7.H4 U7.H5 U7.H12 U7.H13 U7.J4 U7.J5 U7.J12 U7.J13 U7.K5 U7.K12 U7.L5 U7.L12 U7.L14 U7.M5 U7.M6 U7.M7 U7.M8 U7.M9 U7.M10 U7.M11 U7.M12 U7.N8 U7.N9 U11.2 U12.2 U13.2 U14.7 U14.EPAD U15.1 U15.6 U15.7 U15.9 U15.11 U15.12 U15.16 U15.PAD U16.6 U16.EPAD U17.4 Y1.2 Y1.4
I2C0_SCL: J1.18 R73.1 TP39.1 U1.6
I2C0_SDA: J1.19 R74.1 TP70.1 U1.4
IOUT: R50.2 U14.14
N$1: JP2.1 R14.2
N$2: D5.A R5.2
N$3: R29.2 U2.14
N$4: J100.1 R8.9 U7.C16
N$5: J100.2 R8.2 U7.C15
N$6: J100.3 R8.8 U7.B16
N$7: J100.5 R8.3 U7.B15
N$8: TP11.P$1 U7.E3
N$9: J100.8 R8.4 U7.A15
N$10: J100.CD R8.6 TP22.P$1 U7.C14
N$11: U7.B11 U11.4
N$12: U7.A11 U11.1
N$13: TP40.P$1 U11.8
N$14: TP35.P$1 U11.5
N$15: J100.7 R8.7 U7.A16
N$16: TP10.P$1 U7.E2
N$17: TP9.P$1 U7.D3
N$18: TP8.P$1 U7.D2
N$19: JP2.3 R17.12
N$20: TP4.P$1 U7.B10
N$22: R28.1 R31.2 U10.1
N$23: Q1.B R23.1 U10.2
N$24: TP7.P$1 U7.D1
N$25: C32.1 R36.1 R37.1 U12.1
N$27: R35.1 TP44.1 U12.4
N$28: U7.A13 U17.6
N$29: U7.B13 U17.2
N$30: U7.B14 U17.5
N$31: U7.A14 U17.1
N$32: TP56.1 U16.12
N$33: R29.1 U2.15
N$34: R30.2 U2.10
N$35: R30.1 U2.11
N$37: TP36.P$1 U7.B8
N$38: TP37.P$1 U7.B6
N$39: TP38.P$1 U7.C6
N$60: TP157.P$1 U7.H6
N$61: TP173.P$1 U7.D5
N$62: TP166.P$1 U7.G13
N$63: TP160.P$1 U7.F13
N$64: TP154.P$1 U7.G4
N$65: TP156.P$1 U7.F4
N$73: TP141.P$1 U7.K13
N$74: TP139.P$1 U7.J15
N$80: D4.A R4.2
N$81: D3.A R3.2
N$87: D2.A R2.2
N$88: D1.A R1.2
N$90: TP168.P$1 U7.D6
N$91: TP6.P$1 U7.C2
N$92: TP144.P$1 U7.L13
N$98: C44.1 Q6.1 Q6.2 Q6.5 Q6.6 R63.1 U14.16
N$99: Q5.4 R63.2 R64.2 U14.15
N$100: C35.1 R44.1 R45.1 U13.1
N$101: TP5.P$1 U7.C1
N$102: TP15.P$1 U7.L15
N$103: J4.1 J4.2
N$104: TP138.P$1 U7.K14
N$109: TP12.P$1 U7.M14
N$110: R59.1 R60.2 U17.3
N$111: TP69.P$1 U17.7
N$112: TP13.P$1 U7.A10
N$113: Q3.3 R43.2
N$114: R74.2 U7.C11 U7.D11
N$115: R75.2 U7.M2
N$116: R73.2 U7.C10 U7.D10
N$117: Q3.1 R35.2
N$118: C18.1 Q1.C R31.1 TP14.P$1 TP164.P$1 U4.5 U7.K11 U7.L11 U10.3
N$119: TP16.P$1 U7.L16
N$120: TP17.P$1 U7.M15
N$270: D7.A R61.1
N$271: D8.A R62.1
N$385: TP53.1 U16.11
N$401: TP130.P$1 U7.N7 U7.P8 U7.R8 U7.T8
N$404: TP129.P$1 U7.N6
N$405: TP161.P$1 U7.F11 U7.G11
N$479: Q3.5 R48.2
N$499: TP163.P$1 U7.F10 U7.G10 U7.H10 U7.H11 U7.J10 U7.J11 U7.K10 U7.L10
N$504: TP167.P$1 U7.D4 U7.E4
N$519: TP140.P$1 U7.L4 U7.M4
N$520: TP132.P$1 U7.N4 U7.N5
N$524: TP121.P$1 U7.N10 U7.N11
N$525: TP102.P$1 U7.T11
N$529: TP136.P$1 U7.M13
N$575: D6.A R49.1
N$579: Q3.2 R41.2
N$580: R43.1 TP43.1 U13.4
N$589: R72.1 U16.13
N$590: Q4.3 Q6.3 R52.1
N$596: R50.1 R51.2 TP57.1 U14.10
N$597: R42.2 R47.1 TP47.1 U14.11
N$599: R47.2 U14.8 U14.12
N$603: C33.1 R33.2 R38.2
N$604: R38.1 U14.5
N$609: R15.2 U7.M16
N$640: C10.1 C12.1 U3.C2
N$653: R2.1 U7.P13
N$654: R3.1 U7.T14
N$655: R4.1 U7.R14
N$656: R5.1 U7.P14
ON/!OFF: C34.1 Q4.1 R46.2 R49.2 TP50.1 U14.1 U16.8
OPD_PWR: J4.15 J4.16 R71.1
OPD_SCL: J4.13 J4.14 R48.1
OPD_SDA: J4.11 J4.12 R41.1
OSC0_GND: C19.1 C22.1 U7.N15
OSC0_IN: C19.2 R13.2 U7.P16 Y1.1
OSC0_OUT: C22.2 R13.1 U7.N16 Y1.3
OSC1_GND1: C29.2 C30.2 U7.B5
OSC1_IN1: C30.1 R27.2 U7.A6 Y2.P$2
OSC1_OUT1: C29.1 R27.1 U7.A5 Y2.P$1
OUT1_N [diff pair]: J2.5 J2.6 R6.2 U2.8
OUT1_P [diff pair]: J2.7 J2.8 R6.1 U2.9
PB6/SCL: TP67.1 U16.4
PB7/SDA: TP68.1 U16.5
PEN-SCL-FILT: Q3.6 R37.2 R65.1 R67.1 R69.1 TP42.1 TP66.1 U16.15
PEN-SDA-FILT: Q3.4 R45.2 R66.2 R68.2 R70.2 TP41.1 TP65.1 U16.16
PMIC_MUX_IN: TP133.P$1 U7.N13
PMIC_PGOOD: TP110.P$1 U4.2 U7.N12 U7.P11
POUT: TP64.1 U14.13
PRU0_0: TP30.1 U2.24 U7.A1
PRU0_1: TP29.1 U2.26 U7.A2
PRU0_2: TP28.1 U2.27 U7.B2
PRU0_3: TP27.1 U2.29 U7.B1
PRU0_4: TP26.1 U2.30 U7.A3
PRU0_5: TP24.1 U2.31 U7.B3
PRU0_6: TP23.1 U2.33 U7.C3
PRU0_7: R11.2 TP21.1 U7.C4
PRU0_14: TP33.1 U7.P6
PRU0_15: TP34.1 U7.R6
PRU0_16_CLK: TP20.1 U2.23 U7.B4
RESET#: TP109.P$1 U4.4 U7.R11
SENSOR_ENABLE: J2.13 J2.14 U7.F3
SPARE1: J4.9 J4.10
SPARE2: J4.7 J4.8
SPARE3: J4.5 J4.6
SPARE4: J4.3 J4.4
SPI1_CLK: J2.17 J2.18 TP19.1 U7.C5
SPI1_MISO: J2.15 J2.16 TP1.1 U7.C12
SPI1_MOSI: J2.19 J2.20 TP18.1 U7.C13
SYSBOOT0: R17.14 SB0.TP U7.G3
SYSBOOT1: R17.13 SB1.TP U7.G2
SYSBOOT2: J3.2 JP2.2 JP3.2 SB2.TP U7.G1
SYSBOOT3: R17.11 SB3.TP U7.H3
SYSBOOT4: R17.10 SB4.TP U7.H2
SYSBOOT5: R17.15 SB5.TP U7.H1
SYSBOOT6: R17.16 SB6.TP U7.J3
SYSBOOT7: R16.16 SB7.TP U7.J2
SYSBOOT8: R16.15 SB8.TP U7.J1
SYSBOOT9: R16.14 SB9.TP U7.K3
SYSBOOT10: R16.13 SB10.TP U7.K2
SYSBOOT11: R16.12 SB11.TP U7.K1
SYSBOOT12: R16.11 SB12.TP U7.L3
SYSBOOT13: R16.10 SB13.TP U7.L2
SYSBOOT14: R17.9 SB14.TP U7.L1
SYSBOOT15: R16.9 SB15.TP U7.M3
TEC_ENABLE: J2.9 J2.10 U7.F1
THERM+: C51.1 J2.11 J2.12 R21.1 U7.A8
TPS62111-PG: TP48.1 U15.13
TPS62111-SYNC: R34.1 R40.2 TP46.1 U15.5
TPS62111_SW: L1.1 U15.14 U15.15
TXCLK_N [diff pair]: J2.1 J2.2 R7.1 U2.16
TXCLK_P [diff pair]: J2.3 J2.4 R7.2 U2.17
UART0_RX: J1.12 TP31.1 U7.A12
UART0_TX: J1.13 TP32.1 U7.B12
USB_CLI_N: J1.5 U1.3 U7.K16
USB_CLI_P: J1.4 U1.1 U7.K15
USB_CLI_VBUS: FB2.1 J1.1 J1.2
VBUS: J4.21 J4.22 J4.23 J4.24 J4.25 J4.26 Q6.4 R52.2
VBUSP: C33.2 C37.1 C38.1 Q5.1 Q5.2 Q5.5 Q5.6 R34.2 R61.2 TP55.1 U15.2 U15.3 U15.4 U15.8
VDD: C4.1 TP3.P$1 U1.5 U7.K6 U7.K7 U7.L6 U7.L7
VIN_USB: C13.1 FB2.2 U7.J16 U7.P9 U7.R9 U7.T9
VPD: C39.2 R32.2 R36.2 R44.2 R53.2 R55.2 R57.2 R71.2 R72.2 TP63.1 U12.5 U13.5 U16.14